# EAGLE board MAXREFDES98_Schematic (EAGLE 9.6.2)
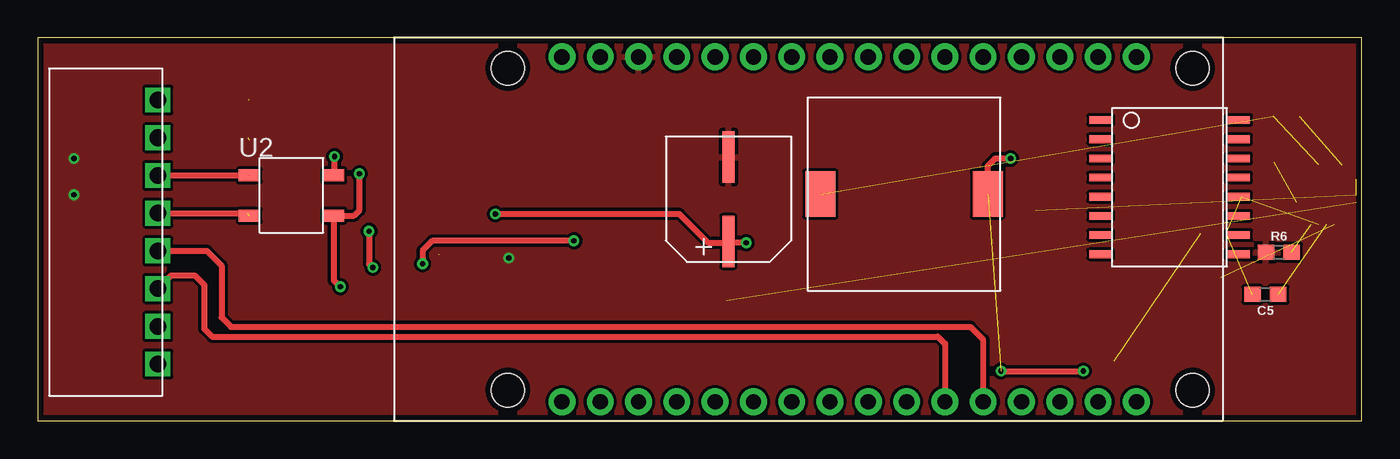
[diagram p0: board, top side]
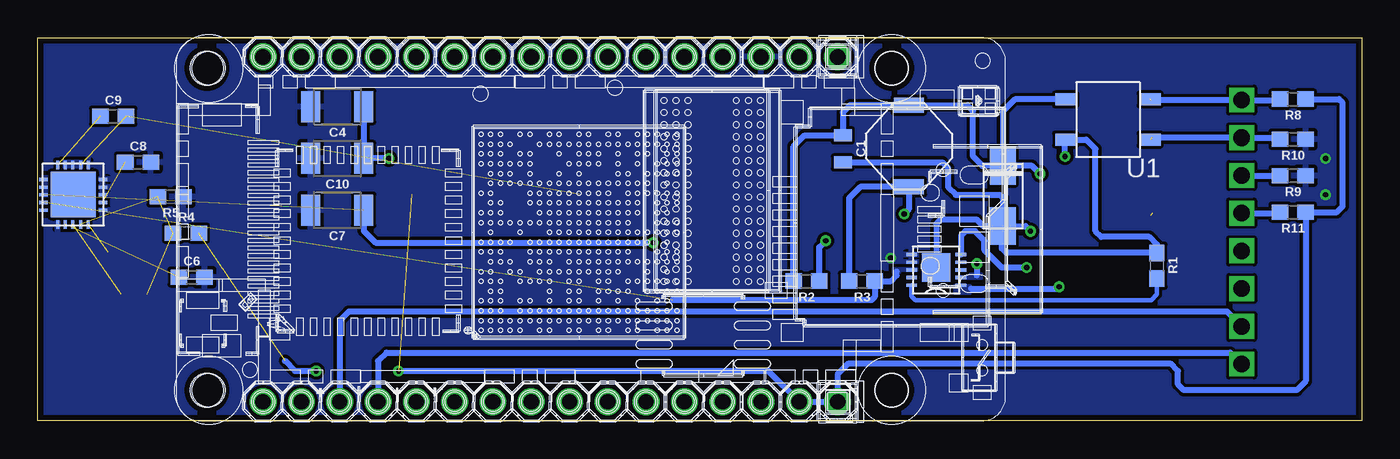
[diagram p1: board, bottom side, seen from below]

Size 87.81 x 25.4 mm. Coordinates in mm from the lower left corner, seen from the top.
Outline: 0,0 87.81,0 87.81,25.4 0,25.4 0,0
Copper layers (1*16): Top 0.0356mm / dielectric 1.5011mm / Bottom 0.0356mm
Design rules "ECE_Senior_Design": minimum track width 8mil, minimum drill 13mil, track to track 8mil, track to pad 8mil, pad to pad 6mil, via to via 8mil, smd to smd 6mil, copper to edge 15mil, drill to drill 8mil, minimum pad ring 7mil, minimum via ring 7mil, stop-mask expansion 3mil, vias tented up to drill 0mil, thermal gap 10mil

## Footprints (pad centres in the part's own frame; a part is rotated, then mirrored left to right if it is on the bottom)
0805 = smd 0.8 x 1.2: 1 -0.9,0; 2 0.9,0
EEE-1JA220UP = smd 0.8 x 3.4: MINUS 4.15,6.95; PLUS 4.15,1.35
1210 = smd 1.27 x 2.06: 1 -1.755,0; 2 1.755,0
0603 = smd 1.1 x 1: 1 -0.85,0; 2 0.85,0
TERM_BLOCK_PLUG_8POS_STR_2.5MM = drill 1.1 square: 1 2.1,7.2; 2 4.6,7.2; 3 7.1,7.2; 4 9.6,7.2; 5 12.1,7.2; 6 14.6,7.2; 7 17.1,7.2; 8 19.6,7.2
SMAJ58A-13-F = smd 2.5 x 1.7: P$1 1.25,3.25; P$2 5.25,3.25
SD53-3R3-R = smd 1 x 2: P$1 0.15,2.86; P$2 5.57,2.86
SLF12575T-150M4R7-PF = smd 2 x 3: P$1 0.85,6.4; P$2 11.95,6.4
MB110S-TP = smd 1.4 x 0.8: + 6.3,0.4; - 6.3,3.07; ~1 0.7,3.07; ~2 0.7,0.4
MAX5969AETB+ = smd 0.706 x 0.225: 1 -0.088,2.566; 2 -0.088,2.058; 3 -0.088,1.55; 4 -0.088,1.042; 5 -0.088,0.533; 6 3.187,0.533; 7 3.187,1.042; 8 3.187,1.55; 9 3.187,2.058; 10 3.187,2.566 | smd 1.899 x 1.9: EP 1.55,1.4
MAX17503ATP+ = smd 0.559 x 0.203: *RESET 0.077,1.016; EN/UVLO 0.077,1.524; MODE 4.012,1.016; PGND2 4.012,3.048; PGND3 4.012,2.54; SGND 4.012,2.032; VCC 4.012,1.524; VIN1 0.077,3.048; VIN2 0.077,2.54; VIN3 0.077,2.032 | smd 0.203 x 0.559: BST 1.016,4.012; CF 2.032,0.077; FB 2.54,0.077; LX1 1.524,4.012; LX2 2.032,4.012; LX3 2.54,4.012; PGND1 3.048,4.012; RT 3.048,0.077; SS 1.524,0.077; SYNC 1.016,0.077 | smd 3 x 3: EPAD 2.045,2.045
L4978D013TR = smd 1.525 x 0.51: 1 -4.562,4.445; 2 -4.562,3.175; 3 -4.562,1.905; 4 -4.562,0.635; 5 -4.562,-0.635; 6 -4.562,-1.905; 7 -4.562,-3.175; 8 -4.562,-4.445; 9 4.562,-4.445; 10 4.562,-3.175; 11 4.562,-1.905; 12 4.562,-0.635; 13 4.562,0.635; 14 4.562,1.905; 15 4.562,3.175; 16 4.562,4.445
NANO_PI = drill 1.016 pad 1.778: 3V3 16.221,1.27; 5V 11.141,1.27; 5V_2 13.681,1.27; CLK 26.381,24.13; CS 23.841,24.13; CVBS 39.081,24.13; DM2 31.461,1.27; DM3 26.381,1.27; DP2 34.001,1.27; DP3 28.921,1.27; GND 16.221,24.13; GND_2 18.761,1.27; IRRX 21.301,1.27; LL 41.621,24.13; LNK 46.701,1.27; LR 44.161,24.13; MISO 28.921,24.13; MN 49.241,24.13; MOSI 31.461,24.13; MP 46.701,24.13; PG11 23.841,1.27; RD+ 39.081,1.27; RD- 36.541,1.27; RX1 34.001,24.13; RXD 11.141,24.13; SCL 18.761,24.13; SDA 21.301,24.13; SPD 49.241,1.27; TD+ 44.161,1.27; TD- 41.621,1.27; TX1 36.541,24.13; TXD 13.681,24.13 | hole 2.2: 52.97,2.03; 7.56,2.03; 7.56,23.37; 52.97,23.37

## Placement (x,y rotation side)
C1  0.1uF  [0805]  34.42,18.03 270 bottom
C2  EEE-1JA220UP  [EEE-1JA220UP]  41.66,10.54 0 top
C4  22uF  [1210]  67.94,20.83 180 bottom
C5  1pF  [0603]  81.41,8.38 180 top
C6  0.018uF  [0603]  77.6,9.53 0 bottom
C7  2.2uF  [1210]  67.94,13.97 180 bottom
C8  2.2uF  [0603]  81.15,17.14 0 bottom
C9  0.1uF  [0603]  82.8,20.19 0 bottom
C10  22uF  [1210]  67.94,17.4 180 bottom
CONN  TERM_BLOCK_PLUG_8POS_STR_2.5MM  [TERM_BLOCK_PLUG_8POS_STR_2.5MM]  0.76,23.37 270 top
D1  SMAJ58A-13-F  [SMAJ58A-13-F]  27.05,18.16 270 bottom
L1  SD53-3R3-R  [SD53-3R3-R]  32.89,21.08 270 bottom
L2  SLF12575T-150M4R7-PF  [SLF12575T-150M4R7-PF]  51.05,8.64 0 top
R1  619  [0603]  13.59,10.29 270 bottom
R2  24.9k  [0603]  36.83,9.27 180 bottom
R3  3.3M  [0603]  33.15,9.27 180 bottom
R4  154k  [0603]  77.98,12.45 0 bottom
R5  34k  [0603]  78.99,14.86 180 bottom
R6  68k  [0603]  82.3,11.18 0 top
R8  0  [0603]  4.57,21.34 180 bottom
R9  0  [0603]  4.57,16.26 180 bottom
R10  0  [0603]  4.57,18.67 180 bottom
R11  0  [0603]  4.57,13.84 180 bottom
U1  MB110S-TP  [MB110S-TP]  13.34,21.72 180 bottom
U2  MB110S-TP  [MB110S-TP]  13.34,13.21 0 top
U3  MAX5969AETB+  [MAX5969AETB+]  26.67,11.56 180 bottom
U4  MAX17503ATP+  [MAX17503ATP+]  87.5,12.95 0 bottom
U$1  L4978D013TR  [L4978D013TR]  75.06,15.49 0 top
U$2  NANO_PI  [NANO_PI]  23.62,0 0 top

## Library data of the parts
C1 = SparkFun-Capacitors; PROD_ID: CAP-11625
C2 = EEE-1JA220UP
C4 C7 C10 = SparkFun-Capacitors; PROD_ID: CAP-09824
C5 = SparkFun-Capacitors; PROD_ID: CAP-08280
C6 C8 C9 = SparkFun-Capacitors; PROD_ID: CAP-00810
CONN U$1 U$2 = Camera_Board_Parts_09_30_2020
D1 = SMAJ58A-13-F
L1 = SD53-3R3-R
L2 = SLF12575T-150M4R7-PF
R1-R5 = SparkFun-Resistors; PROD_ID: RES-12535
R6 = SparkFun-Resistors
R8-R11 = SparkFun-Resistors; PROD_ID: RES-08609
U1 U2 = MB110S-TP
U3 = MAX5969AETB+_Library
U4 = MAX17503ATP+

## Nets
5V_OUT: C4.1 C10.1 L2.P$2 R4.2 R8.1 R11.1 U$2.5V U$2.5V_2
BST: C9.1 U4.BST
CF: C5.1 U4.CF
CLS: R1.2 U3.10
DET: R2.1 U3.2
EPAD: U4.EPAD
FB: C5.2 R4.1 R5.2 U4.FB
GND: C2.MINUS C4.2 C6.2 C7.2 C8.2 C10.2 R5.1 R6.1 R9.1 R10.1 U3.6 U3.7 U4.MODE U4.PGND1 U4.PGND2 U4.PGND3 U4.SGND U4.SYNC U$2.GND
LX: C9.2 L2.P$1 U4.LX1 U4.LX2 U4.LX3
N$8: U$2.3V3
PG_EN/UVLO: R3.1 U3.8 U4.EN/UVLO
RD+: CONN.5 U$2.RD+
RD-: CONN.6 U$2.RD-
RECT1_IN_MINUS: CONN.2 R10.2 U1.~1
RECT1_IN_PLUS: CONN.1 R8.2 U1.~2
RECT2_IN_MINUS: CONN.3 R9.2 U2.~1
RECT2_IN_PLUS: CONN.4 R11.2 U2.~2
RESET: U4.*RESET
RT: R6.2 U4.RT
SS: C6.1 U4.SS
TD+: CONN.7 U$2.TD+
TD-: CONN.8 U$2.TD-
VCC: C8.1 U4.VCC
VDD: C1.1 D1.P$1 L1.P$1 R2.2 U1.+ U2.+ U3.1
VIN: C2.PLUS C7.1 L1.P$2 R3.2 U4.VIN1 U4.VIN2 U4.VIN3
VSS_EP: C1.2 D1.P$2 R1.1 U1.- U2.- U3.5 U3.EP

## Tracks (layer width: path | path; a pad name or v marks a point on that pad's centre or on a via)
5V_OUT  (via drill 0.35)  (2 unrouted)
  Top 0.406: v63.88,3.3 v69.34,3.3 | L2.P$2 63,16.9 63.5,17.4 v64.52,17.4
  Bottom 0.406: v63.88,3.3 39.34,3.3 U$2.5V_2 U$2.5V 34.76,3.08 34.04,3.81 12.7,3.81 12.19,3.3 12.19,2.41 11.81,2.03 4.32,2.03 3.72,2.63 R11.1 1.65,13.84 1.27,14.22 1.27,21.08 1.52,21.34 R8.1 | v69.34,3.3 70.74,3.3 71.41,3.98 | v64.52,17.4 C10.1 C4.1
BST  (1 unrouted)
CF  (1 unrouted)
CLS
  Bottom 0.305: R1.2 13.59,8.38 13.97,8 29.59,8 29.86,8.27 U3.10
DET  (via drill 0.35)
  Top 0.406: v35.56,11.94 26.16,11.94 25.53,11.3 v25.53,10.41
  Bottom 0.406: R2.1 35.98,11.52 v35.56,11.94 | v25.53,10.41 25.53,9.65
  pour Bottom (no thermals): 26.04,9.65 26.92,9.65 26.92,9.4 25.15,9.4 25.15,9.78 26.04,9.78
FB  (3 unrouted)
GND  (via drill 0.35)
  other vias: 2.41,17.4 2.41,14.99 31.24,10.79
  pour Top: -0.51,25.91 -0.51,-0.51 88.27,-0.51 88.27,25.91
  pour Bottom (rank 2): -0.51,25.91 88.27,25.91 88.27,-0.51 -0.51,-0.51
LX  (2 unrouted)
  pour Bottom (no thermals): 84.84,17.27 84.84,16.64 86.11,16.64 86.11,17.27
PG_EN/UVLO  (1 unrouted)
  Bottom 0.406: 45.72,8 32.51,8 32.3,8.22 R3.1 31.24,9.27 30.86,9.65 30.86,9.91
  pour Bottom (no thermals): 29.46,10.16 29.46,9.91 30.61,9.91 30.61,9.78 31.11,9.78 31.11,10.16
RD+
  Top 0.406: U$2.RD+ 62.7,5.37 61.85,6.22 12.83,6.22 12.19,6.86 12.19,10.29 11.21,11.27 CONN.5
RD-
  Top 0.406: U$2.RD- 60.16,5.12 59.69,5.59 11.56,5.59 11.05,6.1 11.05,9.02 10.41,9.65 8.85,9.65 CONN.6
RECT1_IN_MINUS  (1 unrouted)
  Bottom 0.406: 13.91,18.77 CONN.2 5.52,18.77 R10.2
RECT1_IN_PLUS  (1 unrouted)
  Bottom 0.406: 13.99,21.27 CONN.1 5.49,21.27 R8.2
RECT2_IN_MINUS  (1 unrouted)
  Top 0.406: CONN.3 14.03,16.27
  Bottom 0.406: CONN.3 7.95,16.26 R9.2
RECT2_IN_PLUS  (1 unrouted)
  Top 0.406: CONN.4 13.88,13.77
  Bottom 0.406: CONN.4 5.5,13.77 R11.2
RT  (1 unrouted)
SS  (1 unrouted)
TD+
  Bottom 0.406: CONN.7 8.93,7.24 67.18,7.24 67.78,6.64 U$2.TD+
TD-
  Bottom 0.406: CONN.8 8.72,4.53 64.69,4.53 65.24,3.97 U$2.TD-
VCC  (1 unrouted)
VDD  (via drill 0.35)
  Top 0.406: v21.34,16.38 21.34,13.97 20.97,13.61 U2.+ 19.64,9.32 v20.07,8.89
  Bottom 0.406: U1.+ 23.01,21.32 23.8,20.52 D1.P$1 | v21.34,16.38 21.86,16.91 D1.P$1 | D1.P$1 25.17,16.91 25.78,17.53 25.78,20.57 26.14,20.93 L1.P$1 33.93,20.93 34.42,20.45 C1.1 36.95,18.93 37.68,18.2 R2.2 | 25.91,8.76 20.19,8.76 v20.07,8.89
  pour Bottom (no thermals): 25.91,9.02 25.91,8.38 27.05,8.38 27.05,9.02
VIN  (via drill 0.35)  (3 unrouted)
  Top 0.406: v30.35,13.72 42.55,13.72 44.45,11.81 45.89,11.81 | v46.99,11.81 45.89,11.81 | 45.89,11.81 C2.PLUS
  Bottom 0.406: R3.2 34,14.77 33.26,15.51 L1.P$2 30.03,14.04 v30.35,13.72 | C7.1 66.19,12.6 65.41,11.81 v46.99,11.81
  pour Bottom (no thermals): 87.12,16.26 87.12,14.86 87.76,14.86 87.76,16.26
VSS_EP  (via drill 0.35)  (1 unrouted)
  Top 0.406: U2.- 19.68,16.33 v19.68,17.53 | v21.97,12.57 21.97,10.41 v22.23,10.16
  Bottom 0.406: v19.68,17.53 19.68,18.6 U1.- 18.27,18.65 17.65,18.03 17.65,12.57 17.27,12.19 14.1,12.19 13.59,11.68 R1.1 23.58,11.14 23.88,11.43 23.88,12.84 D1.P$2 | C1.2 27.8,17.13 27.43,16.76 27.43,15.49 26.92,14.99 24,14.99 23.8,14.78 D1.P$2 | D1.P$2 22.31,12.91 v21.97,12.57 | v22.23,10.16 23.88,10.16 25.02,11.3 25.02,11.94 25.65,12.57 26.29,12.57 26.58,12.28 26.58,11.03 | D1.P$2 25.1,12.91 25.53,13.34 27.94,13.34 28.22,13.06 U3.EP